# Altium PCB bigsegment.PcbDoc
Units mm, origin at the board's own origin, x right, y up, seen from the top; angles counter-clockwise.
Board outline 152.4 x 101.6 mm, 2 copper layers (Top Layer, Bottom Layer); 170 components, 143 nets, 350 pads, 0 vias.
Unrouted connection lines stored in the file: 200.
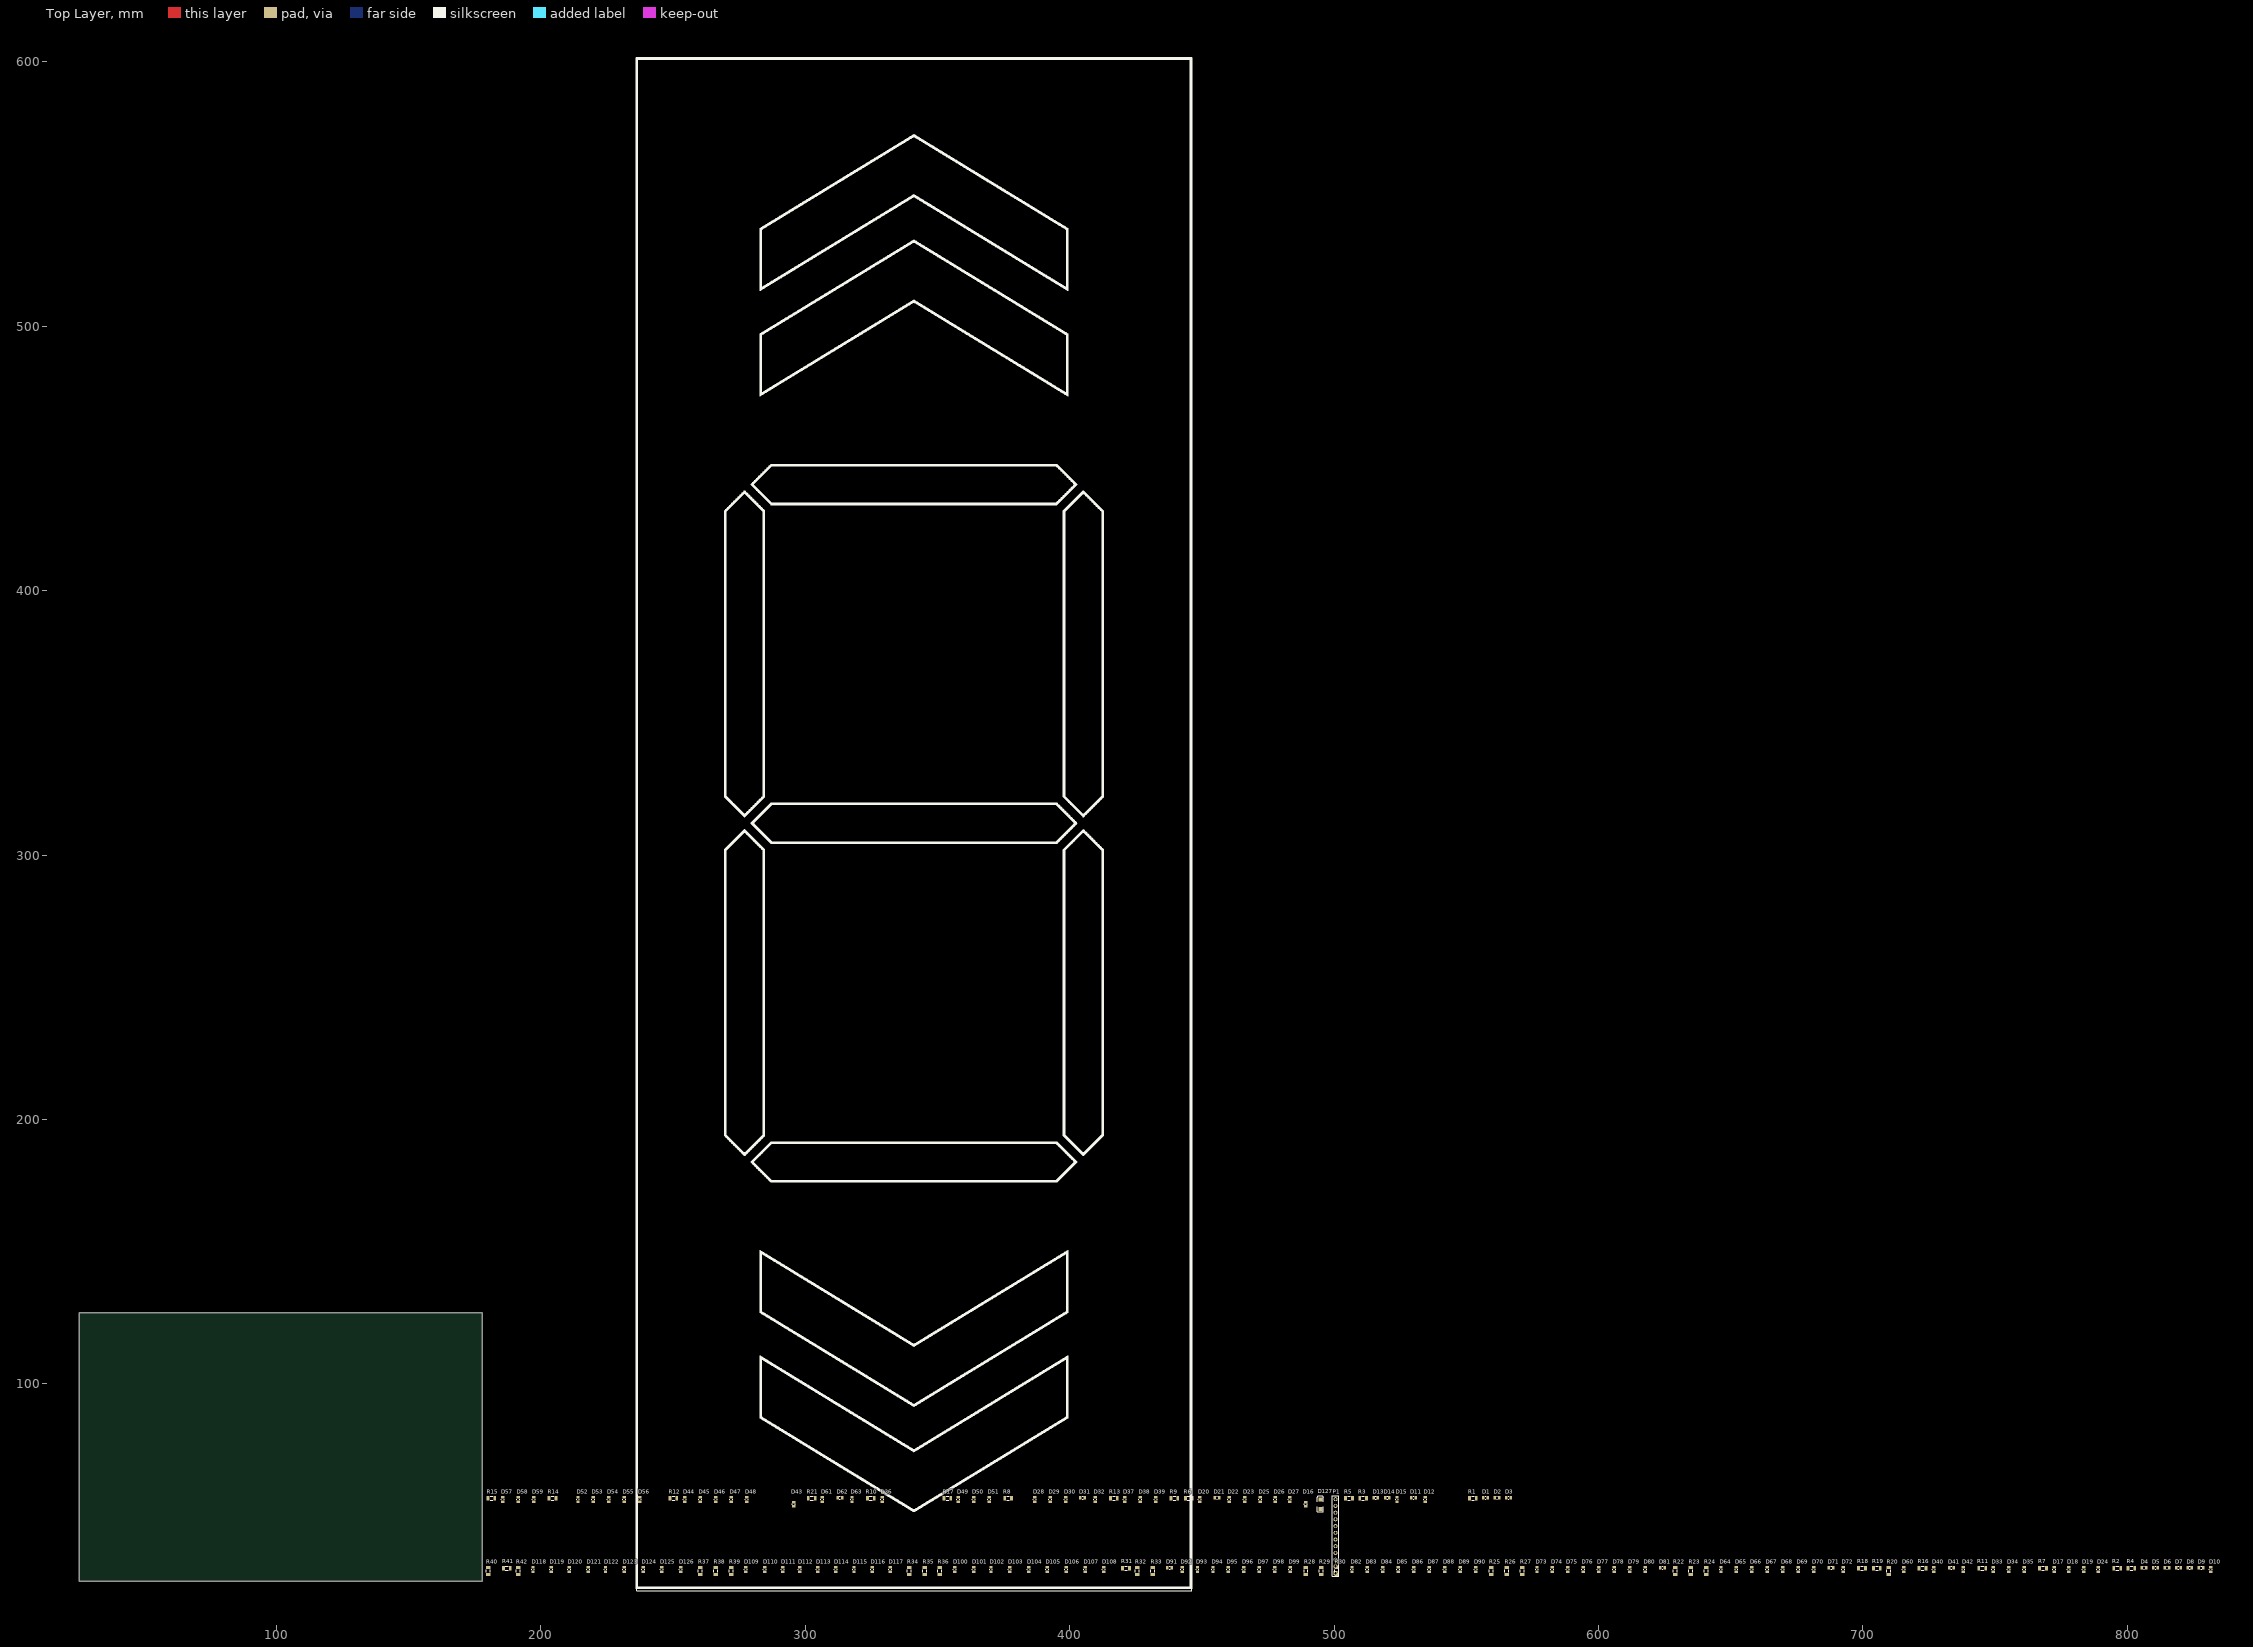
[diagram p0: Top Layer view]
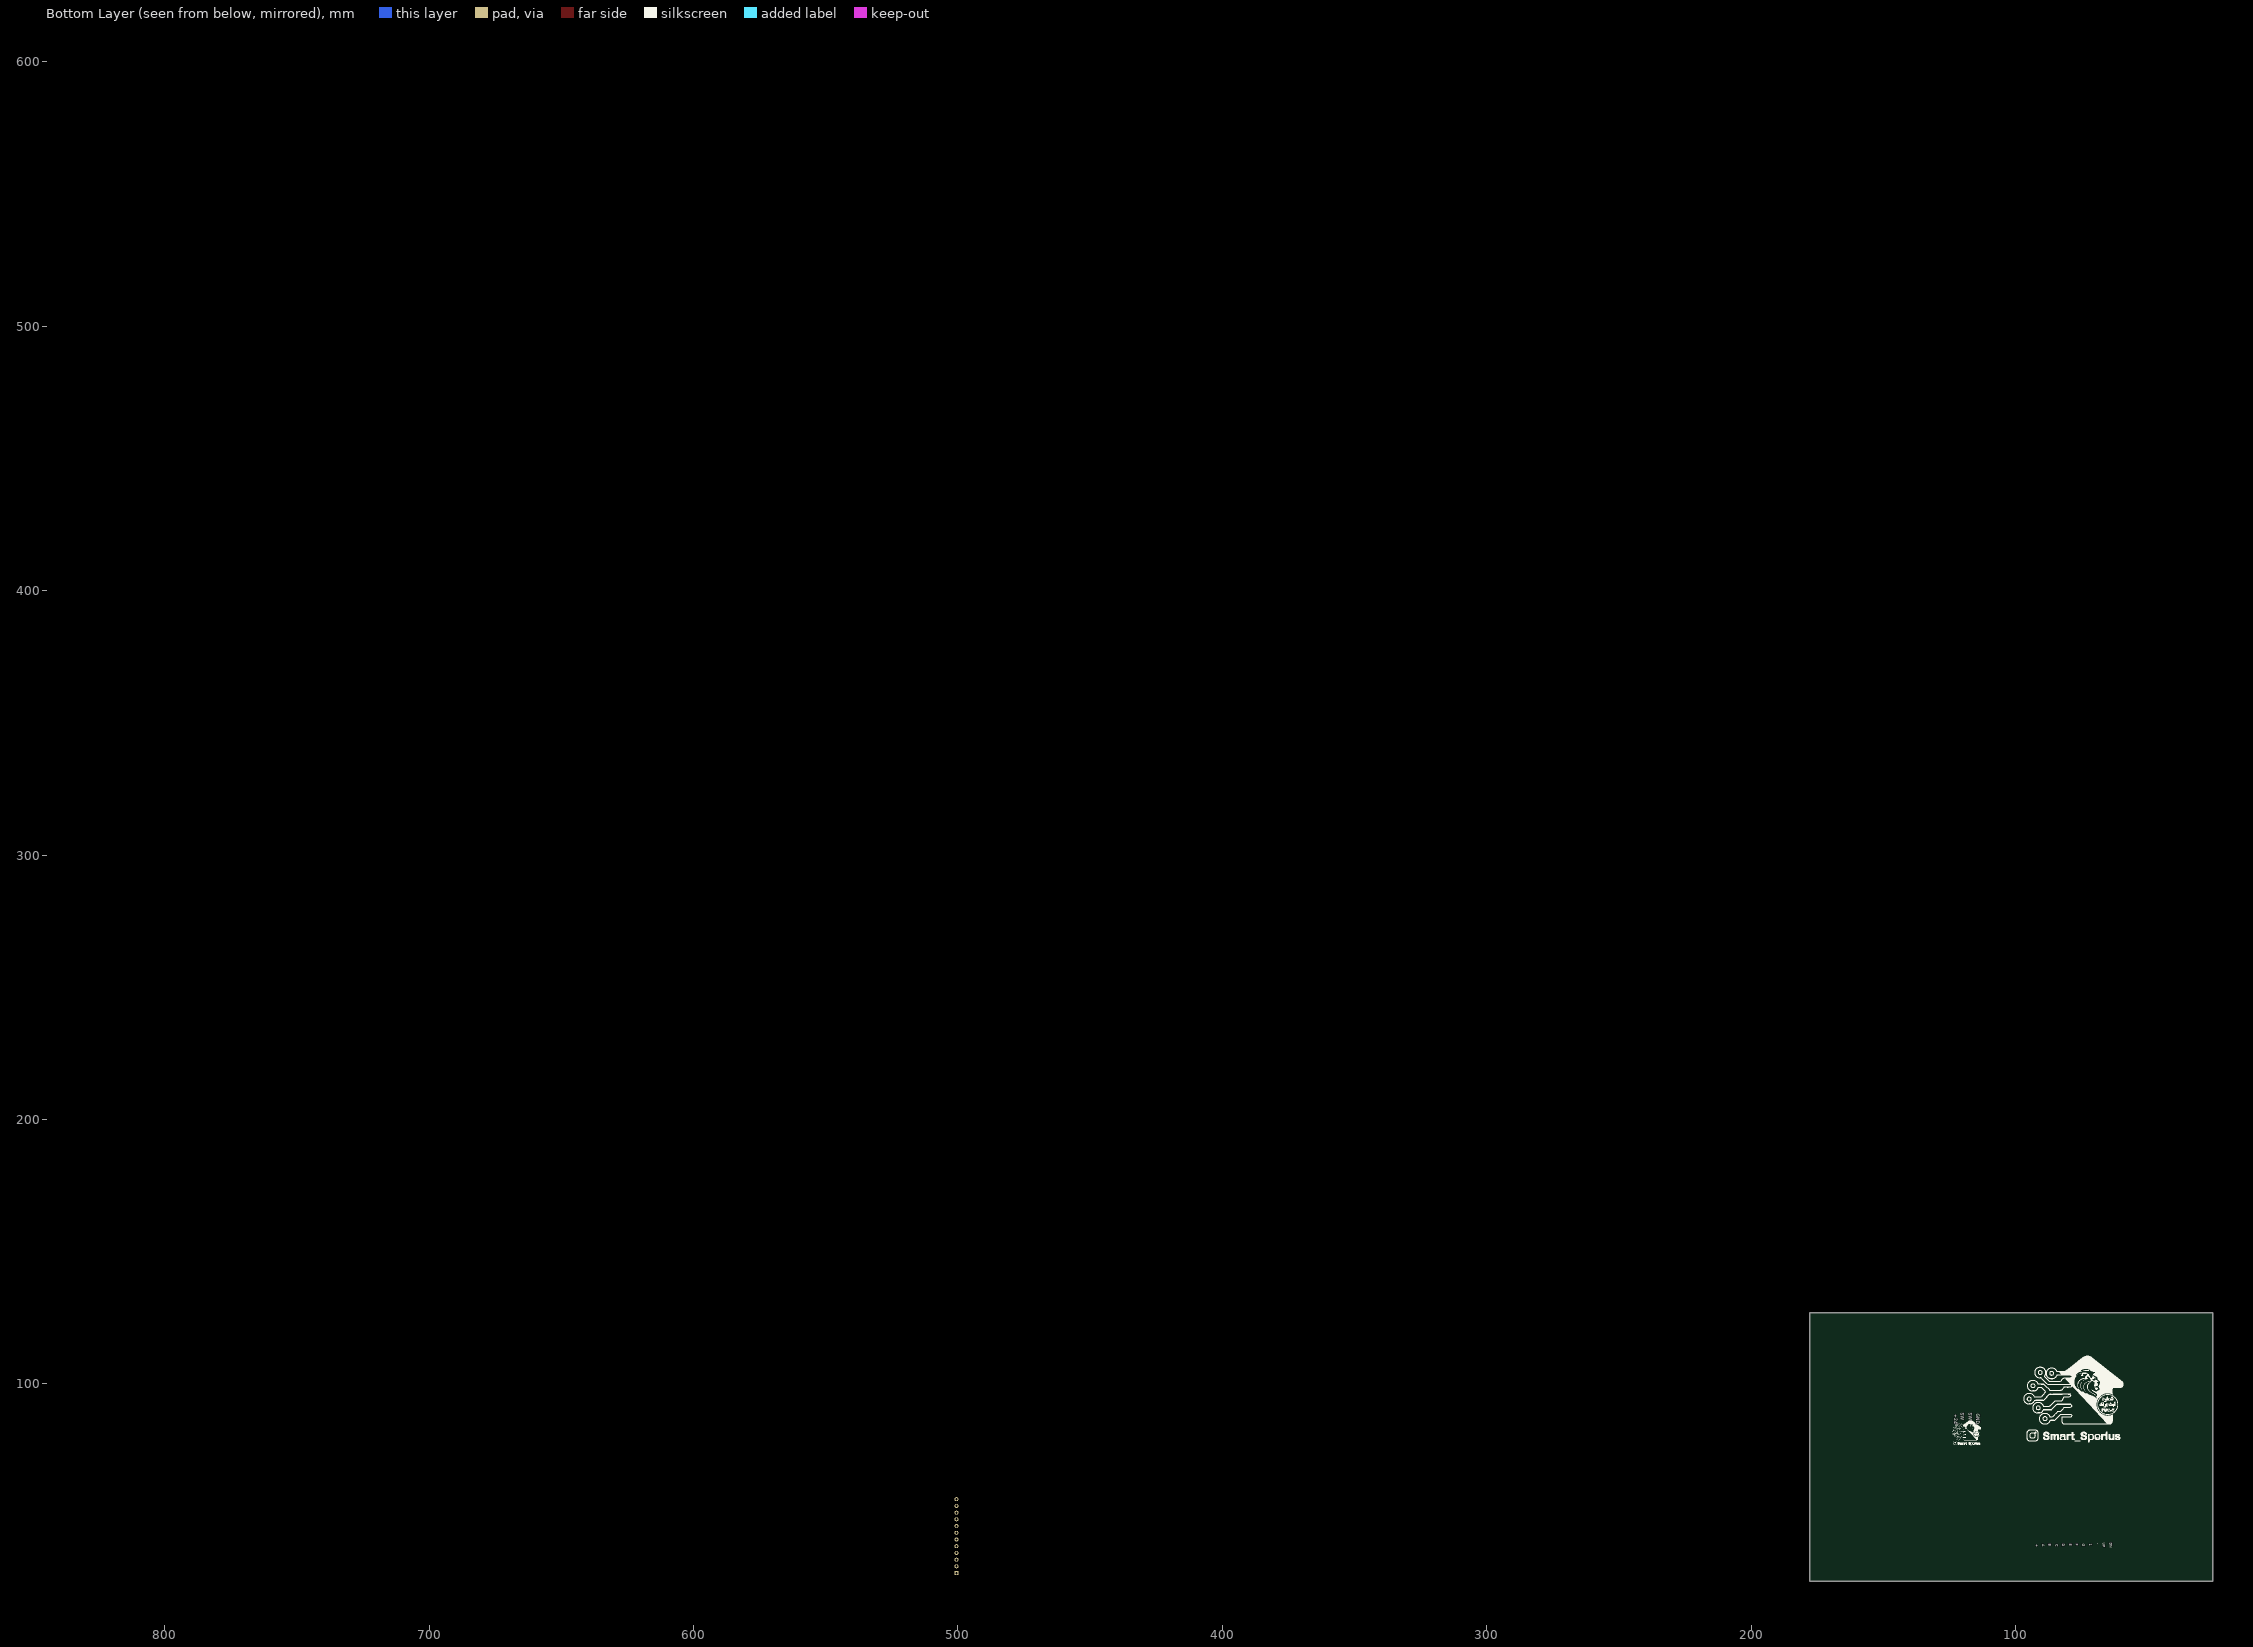
[diagram p1: Bottom Layer view, seen from below]

## Layer stack, top to bottom
Top Solder: solder mask 0.0102, Solder Resist, Dk 3.5
Top Layer: signal copper 0.0356
Dielectric 1: dielectric 0.32, FR-4, Dk 4.8
Bottom Layer: signal copper 0.0356
Bottom Solder: solder mask 0.0102, Solder Resist, Dk 3.5

## Board outline
25.4,25.4 177.8,25.4 177.8,127 25.4,127

## Design rules (kind name [scope] priority, off if disabled: settings)
Clearance Clearance_1 [All] p1: gap=0.4 ignorepadtopadclearanceinfootprint=FALSE
Clearance [All] p2: gap=0.254 ignorepadtopadclearanceinfootprint=FALSE except(0: Arc-Hole Track-Hole SMDPad-Hole THPad-Hole Via-Hole Fill-Hole Poly-Hole Region-Hole Text-Hole)
DiffPairsRouting [All] p1: maxlimit=0.8 minlimit=0.381 mostfreqgap=0.8 toplayer_minwidth=0.381 toplayer_maxwidth=0.381 toplayer_prefwidth=0.381 bottomlayer_minwidth=0.381 bottomlayer_maxwidth=0.381 bottomlayer_prefwidth=0.381 maxuncoupledlength=12.7
PolygonConnect [All] p1: connectstyle=Relief reliefconductorwidth=0.254 reliefentries=4 polygonreliefangle="90 Angle" airgapwidth=0.254
RoomDefinition bigsegment [InComponentClass('bigsegment')] p1: confinementstyle=ConfineIn formatcopy=TRUE lockcomponents=FALSE outline 178.943,26.924 211.328,26.924 211.328,32.766 178.943,32.766
RoutingVias [All] p1: holewidth=0.711 width=1.27 viastyle="Through Hole" minholewidth=0.711 minwidth=1.27 maxholewidth=0.711 maxwidth=1.27
SolderMaskExpansion [All] p1: expansion=0.102 istentingtop=FALSE
SupplyNets "Schematic Supply Nets" [InNet('VCC')] p1: voltage=0.000
Width [All] p1: maxlimit=3 minlimit=0.5 preferedwidth=1
29 further rules are at their usual default settings.

## Classes and differential pairs
component class bigsegment: D1 D2 D3 D4 D11 D12 D16 D20 D21 D22 D23 D28 D29 D30 D31 D32 D36 D43 D44 D45 D46 D47 D48 D52 D53 D54 D55 D56 D57 D58 D59 D60 D61 D62 D63 D64 D65 D66 D67 D68 D69 D70 D71 D72 D73 D74 D75 D76 D77 D78 D79 D80 D81 D82 D83 D84 D85 D86 D87 D88 D89 D90 D91 D92 D93 D94 D95 D96 D97 D98 D99 D100 D101 D102 D103 D104 D105 D106 D107 D108 D109 D110 D111 D112 D113 D114 D115 D116 D117 D118 D119 D120 D121 D122 D123 D124 D125 D126 D127 P1 R1 R3 R6 R8 R10 R12 R14 R15 R16 R17 R18 R19 R20 R21 R22 R23 R24 R25 R26 R27 R28 R29 R30 R31 R32 R33 R34 R35 R36 R37 R38 R39 R40 R41 R42

## Components (designator, comment, footprint, x,y, rotation, side; value= is the part's Value field where it differs from the comment)
D1 "MODEL" "RES 0805 (2012X06L)" 557.276,56.896 r0 top
D2 "MODEL" "RES 0805 (2012X06L)" 561.594,56.896 r0 top
D3 "MODEL" "RES 0805 (2012X06L)" 565.912,56.896 r0 top
D4 "MODEL" "RES 0805 (2012X06L)" 806.323,30.48 r0 top
D5 "MODEL" "RES 0805 (2012X06L)" 810.641,30.48 r0 top
D6 "MODEL" "RES 0805 (2012X06L)" 814.959,30.48 r0 top
D7 "MODEL" "RES 0805 (2012X06L)" 819.277,30.48 r0 top
D8 "MODEL" "RES 0805 (2012X06L)" 823.595,30.48 r0 top
D9 "MODEL" "RES 0805 (2012X06L)" 827.913,30.48 r0 top
D10 "MODEL" "RES 0805 (2012X06L)" 831.596,29.845 r90 top
D11 "MODEL" "RES 0805 (2012X06L)" 529.971,56.896 r0 top
D12 "MODEL" "RES 0805 (2012X06L)" 534.416,56.261 r90 top
D13 "MODEL" "RES 0805 (2012X06L)" 515.747,56.896 r0 top
D14 "MODEL" "RES 0805 (2012X06L)" 520.065,56.896 r0 top
D15 "MODEL" "RES 0805 (2012X06L)" 523.748,56.261 r90 top
D16 "MODEL" "RES 0805 (2012X06L)" 489.204,54.483 r90 top
D17 "MODEL" "RES 0805 (2012X06L)" 772.287,29.845 r90 top
D18 "MODEL" "RES 0805 (2012X06L)" 777.875,29.845 r90 top
D19 "MODEL" "RES 0805 (2012X06L)" 783.463,29.845 r90 top
D20 "MODEL" "RES 0805 (2012X06L)" 449.199,56.261 r90 top
D21 "MODEL" "RES 0805 (2012X06L)" 455.676,56.896 r0 top
D22 "MODEL" "RES 0805 (2012X06L)" 460.375,56.261 r90 top
D23 "MODEL" "RES 0805 (2012X06L)" 466.217,56.261 r90 top
D24 "MODEL" "RES 0805 (2012X06L)" 789.051,29.845 r90 top
D25 "MODEL" "RES 0805 (2012X06L)" 472.059,56.261 r90 top
D26 "MODEL" "RES 0805 (2012X06L)" 477.647,56.261 r90 top
D27 "MODEL" "RES 0805 (2012X06L)" 483.235,56.261 r90 top
D28 "MODEL" "RES 0805 (2012X06L)" 386.715,56.261 r90 top
D29 "MODEL" "RES 0805 (2012X06L)" 392.557,56.261 r90 top
D30 "MODEL" "RES 0805 (2012X06L)" 398.399,56.261 r90 top
D31 "MODEL" "RES 0805 (2012X06L)" 404.876,56.896 r0 top
D32 "MODEL" "RES 0805 (2012X06L)" 409.575,56.261 r90 top
D33 "MODEL" "RES 0805 (2012X06L)" 749.3,29.845 r90 top
D34 "MODEL" "RES 0805 (2012X06L)" 755.142,29.845 r90 top
D35 "MODEL" "RES 0805 (2012X06L)" 760.984,29.845 r90 top
D36 "MODEL" "RES 0805 (2012X06L)" 329.057,56.261 r90 top
D37 "MODEL" "RES 0805 (2012X06L)" 420.751,56.261 r90 top
D38 "MODEL" "RES 0805 (2012X06L)" 426.593,56.261 r90 top
D39 "MODEL" "RES 0805 (2012X06L)" 432.435,56.261 r90 top
D40 "MODEL" "RES 0805 (2012X06L)" 726.821,29.845 r90 top
D41 "MODEL" "RES 0805 (2012X06L)" 733.425,30.48 r0 top
D42 "MODEL" "RES 0805 (2012X06L)" 737.997,29.845 r90 top
D43 "MODEL" "RES 0805 (2012X06L)" 295.656,54.483 r90 top
D44 "MODEL" "RES 0805 (2012X06L)" 254.381,56.261 r90 top
D45 "MODEL" "RES 0805 (2012X06L)" 260.223,56.261 r90 top
D46 "MODEL" "RES 0805 (2012X06L)" 266.065,56.261 r90 top
D47 "MODEL" "RES 0805 (2012X06L)" 271.907,56.261 r90 top
D48 "MODEL" "RES 0805 (2012X06L)" 277.749,56.261 r90 top
D49 "MODEL" "RES 0805 (2012X06L)" 357.886,56.261 r90 top
D50 "MODEL" "RES 0805 (2012X06L)" 363.728,56.261 r90 top
D51 "MODEL" "RES 0805 (2012X06L)" 369.57,56.261 r90 top
D52 "MODEL" "RES 0805 (2012X06L)" 213.995,56.261 r90 top
D53 "MODEL" "RES 0805 (2012X06L)" 219.837,56.261 r90 top
D54 "MODEL" "RES 0805 (2012X06L)" 225.679,56.261 r90 top
D55 "MODEL" "RES 0805 (2012X06L)" 231.521,56.261 r90 top
D56 "MODEL" "RES 0805 (2012X06L)" 237.363,56.261 r90 top
D57 "MODEL" "RES 0805 (2012X06L)" 185.547,56.261 r90 top
D58 "MODEL" "RES 0805 (2012X06L)" 191.389,56.261 r90 top
D59 "MODEL" "RES 0805 (2012X06L)" 197.231,56.261 r90 top
D60 "MODEL" "RES 0805 (2012X06L)" 715.391,29.845 r90 top
D61 "MODEL" "RES 0805 (2012X06L)" 306.451,56.261 r90 top
D62 "MODEL" "RES 0805 (2012X06L)" 313.055,56.896 r0 top
D63 "MODEL" "RES 0805 (2012X06L)" 317.627,56.261 r90 top
D64 "MODEL" "RES 0805 (2012X06L)" 646.303,29.845 r90 top
D65 "MODEL" "RES 0805 (2012X06L)" 652.145,29.845 r90 top
D66 "MODEL" "RES 0805 (2012X06L)" 657.987,29.845 r90 top
D67 "MODEL" "RES 0805 (2012X06L)" 663.829,29.845 r90 top
D68 "MODEL" "RES 0805 (2012X06L)" 669.671,29.845 r90 top
D69 "MODEL" "RES 0805 (2012X06L)" 675.513,29.845 r90 top
D70 "MODEL" "RES 0805 (2012X06L)" 681.355,29.845 r90 top
D71 "MODEL" "RES 0805 (2012X06L)" 687.959,30.48 r0 top
D72 "MODEL" "RES 0805 (2012X06L)" 692.531,29.845 r90 top
D73 "MODEL" "RES 0805 (2012X06L)" 576.707,29.845 r90 top
D74 "MODEL" "RES 0805 (2012X06L)" 582.549,29.845 r90 top
D75 "MODEL" "RES 0805 (2012X06L)" 588.391,29.845 r90 top
D76 "MODEL" "RES 0805 (2012X06L)" 594.233,29.845 r90 top
D77 "MODEL" "RES 0805 (2012X06L)" 600.075,29.845 r90 top
D78 "MODEL" "RES 0805 (2012X06L)" 605.917,29.845 r90 top
D79 "MODEL" "RES 0805 (2012X06L)" 611.759,29.845 r90 top
D80 "MODEL" "RES 0805 (2012X06L)" 617.601,29.845 r90 top
D81 "MODEL" "RES 0805 (2012X06L)" 624.205,30.48 r0 top
D82 "MODEL" "RES 0805 (2012X06L)" 506.73,29.845 r90 top
D83 "MODEL" "RES 0805 (2012X06L)" 512.572,29.845 r90 top
D84 "MODEL" "RES 0805 (2012X06L)" 518.414,29.845 r90 top
D85 "MODEL" "RES 0805 (2012X06L)" 524.256,29.845 r90 top
D86 "MODEL" "RES 0805 (2012X06L)" 530.098,29.845 r90 top
D87 "MODEL" "RES 0805 (2012X06L)" 535.94,29.845 r90 top
D88 "MODEL" "RES 0805 (2012X06L)" 541.782,29.845 r90 top
D89 "MODEL" "RES 0805 (2012X06L)" 547.624,29.845 r90 top
D90 "MODEL" "RES 0805 (2012X06L)" 553.466,29.845 r90 top
D91 "MODEL" "RES 0805 (2012X06L)" 437.769,30.48 r0 top
D92 "MODEL" "RES 0805 (2012X06L)" 442.468,29.845 r90 top
D93 "MODEL" "RES 0805 (2012X06L)" 448.31,29.845 r90 top
D94 "MODEL" "RES 0805 (2012X06L)" 454.152,29.845 r90 top
D95 "MODEL" "RES 0805 (2012X06L)" 459.994,29.845 r90 top
D96 "MODEL" "RES 0805 (2012X06L)" 465.836,29.845 r90 top
D97 "MODEL" "RES 0805 (2012X06L)" 471.678,29.845 r90 top
D98 "MODEL" "RES 0805 (2012X06L)" 477.52,29.845 r90 top
D99 "MODEL" "RES 0805 (2012X06L)" 483.362,29.845 r90 top
D100 "MODEL" "RES 0805 (2012X06L)" 356.489,29.845 r90 top
D101 "MODEL" "RES 0805 (2012X06L)" 363.601,29.845 r90 top
D102 "MODEL" "RES 0805 (2012X06L)" 370.205,29.845 r90 top
D103 "MODEL" "RES 0805 (2012X06L)" 377.317,29.845 r90 top
D104 "MODEL" "RES 0805 (2012X06L)" 384.429,29.845 r90 top
D105 "MODEL" "RES 0805 (2012X06L)" 391.541,29.845 r90 top
D106 "MODEL" "RES 0805 (2012X06L)" 398.653,29.845 r90 top
D107 "MODEL" "RES 0805 (2012X06L)" 405.765,29.845 r90 top
D108 "MODEL" "RES 0805 (2012X06L)" 412.877,29.845 r90 top
D109 "MODEL" "RES 0805 (2012X06L)" 277.495,29.845 r90 top
D110 "MODEL" "RES 0805 (2012X06L)" 284.607,29.845 r90 top
D111 "MODEL" "RES 0805 (2012X06L)" 291.465,29.845 r90 top
D112 "MODEL" "RES 0805 (2012X06L)" 297.815,29.845 r90 top
D113 "MODEL" "RES 0805 (2012X06L)" 304.673,29.845 r90 top
D114 "MODEL" "RES 0805 (2012X06L)" 311.531,29.845 r90 top
D115 "MODEL" "RES 0805 (2012X06L)" 318.389,29.845 r90 top
D116 "MODEL" "RES 0805 (2012X06L)" 325.247,29.845 r90 top
D117 "MODEL" "RES 0805 (2012X06L)" 332.105,29.845 r90 top
D118 "MODEL" "RES 0805 (2012X06L)" 196.977,29.845 r90 top
D119 "MODEL" "RES 0805 (2012X06L)" 203.835,29.845 r90 top
D120 "MODEL" "RES 0805 (2012X06L)" 210.693,29.845 r90 top
D121 "MODEL" "RES 0805 (2012X06L)" 217.805,29.845 r90 top
D122 "MODEL" "RES 0805 (2012X06L)" 224.409,29.845 r90 top
D123 "MODEL" "RES 0805 (2012X06L)" 231.521,29.845 r90 top
D124 "MODEL" "RES 0805 (2012X06L)" 238.633,29.845 r90 top
D125 "MODEL" "RES 0805 (2012X06L)" 245.745,29.845 r90 top
D126 "MODEL" "RES 0805 (2012X06L)" 252.857,29.845 r90 top
D127 "D Tunnel1" 3.2X1.6X1.1 494.792,54.483 r90 top
P1 "Header 12" HDR1X12 500.507,28.448 r90 top
R1 "10K" "RES 1206 (3216X08L)" 552.45,56.769 r0 top
R2 "10K" "RES 1206 (3216X08L)" 796.163,30.353 r0 top
R3 "10K" "RES 1206 (3216X08L)" 510.921,56.769 r0 top
R4 "10K" "RES 1206 (3216X08L)" 801.497,30.353 r0 top
R5 "10K" "RES 1206 (3216X08L)" 505.587,56.769 r0 top
R6 "10K" "RES 1206 (3216X08L)" 445.008,56.769 r0 top
R7 "10K" "RES 1206 (3216X08L)" 768.096,30.353 r0 top
R8 "10K" "RES 1206 (3216X08L)" 376.682,56.769 r0 top
R9 "10K" "RES 1206 (3216X08L)" 439.547,56.769 r0 top
R10 "10K" "RES 1206 (3216X08L)" 324.739,56.769 r0 top
R11 "10K" "RES 1206 (3216X08L)" 745.109,30.353 r0 top
R12 "10K" "RES 1206 (3216X08L)" 250.063,56.769 r0 top
R13 "10K" "RES 1206 (3216X08L)" 416.687,56.769 r0 top
R14 "10K" "RES 1206 (3216X08L)" 204.343,56.769 r0 top
R15 "10K" "RES 1206 (3216X08L)" 181.229,56.769 r0 top
R16 "10K" "RES 1206 (3216X08L)" 722.503,30.353 r0 top
R17 "10K" "RES 1206 (3216X08L)" 353.695,56.769 r0 top
R18 "10K" "RES 1206 (3216X08L)" 699.643,30.353 r0 top
R19 "10K" "RES 1206 (3216X08L)" 705.231,30.353 r0 top
R20 "10K" "RES 1206 (3216X08L)" 709.803,29.21 r90 top
R21 "10K" "RES 1206 (3216X08L)" 302.387,56.769 r0 top
R22 "10K" "RES 1206 (3216X08L)" 629.031,29.21 r90 top
R23 "10K" "RES 1206 (3216X08L)" 634.873,29.21 r90 top
R24 "10K" "RES 1206 (3216X08L)" 640.715,29.21 r90 top
R25 "10K" "RES 1206 (3216X08L)" 559.435,29.21 r90 top
R26 "10K" "RES 1206 (3216X08L)" 565.277,29.21 r90 top
R27 "10K" "RES 1206 (3216X08L)" 571.119,29.21 r90 top
R28 "10K" "RES 1206 (3216X08L)" 489.331,29.21 r90 top
R29 "10K" "RES 1206 (3216X08L)" 495.173,29.21 r90 top
R30 "10K" "RES 1206 (3216X08L)" 501.015,29.21 r90 top
R31 "10K" "RES 1206 (3216X08L)" 421.259,30.353 r0 top
R32 "10K" "RES 1206 (3216X08L)" 425.577,29.21 r90 top
R33 "10K" "RES 1206 (3216X08L)" 431.419,29.21 r90 top
R34 "10K" "RES 1206 (3216X08L)" 339.217,29.21 r90 top
R35 "10K" "RES 1206 (3216X08L)" 345.059,29.21 r90 top
R36 "10K" "RES 1206 (3216X08L)" 350.901,29.21 r90 top
R37 "10K" "RES 1206 (3216X08L)" 260.223,29.21 r90 top
R38 "10K" "RES 1206 (3216X08L)" 266.065,29.21 r90 top
R39 "10K" "RES 1206 (3216X08L)" 271.907,29.21 r90 top
R40 "10K" "RES 1206 (3216X08L)" 180.086,29.21 r90 top
R41 "10K" "RES 1206 (3216X08L)" 187.071,30.353 r0 top
R42 "10K" "RES 1206 (3216X08L)" 191.389,29.21 r90 top

## Footprints (in the part's own frame and the unit in brackets; to place one, negate y for a bottom-side part, rotate by r counter-clockwise, add the part's x,y. Pads: shape width x height; smd on the part's side, far side on the other; paste and mask are expansions set on the pad)
3.2X1.6X1.1 [mm] "SMT LED; 2 Flat Leads"
  rect 1.5x1.5 smd: 1(-1.75,0) 2(1.75,0)
  silkscreen extent -2.9,-1.15 3.2,1.15
HDR1X12 [mm] "Connector; Header; 12 Position"
  rect 1.5x1.5 hole 0.9: 1(0,0)
  round 1.5 hole 0.9: 2(2.54,0) 3(5.08,0) 4(7.62,0) 5(10.16,0) 6(12.7,0) 7(15.24,0) 8(17.78,0) 9(20.32,0) 10(22.86,0) 11(25.4,0) 12(27.94,0)
  silkscreen extent -1.27,-1.27 29.21,1.27
"RES 0805 (2012X06L)" [mm] "Chip Resistor, 2-Leads, Body 2.0x1.3mm, IPC High Density _ (0.100 W)"
  rect 0.95x1.3 smd: 1(-0.838,0) 2(0.812,0)
  silkscreen extent -0.16,-0.55 0.14,0.55, body extent -1.03,-0.63 1,0.64, height 0.6
"RES 1206 (3216X08L)" [mm] "Chip Resistor, 2-Leads, Body 3.2x1.6mm, IPC High Density _ (0.125 W)"
  rect 1.05x1.7 smd: 1(-1.295,0) 2(1.301,0)
  silkscreen extent -0.5,-0.75 0.5,0.75, body extent -1.52,-0.76 1.53,0.76, height 0.6

## Part data
D1 D2 D3 D4 D5 D6 D7 D8 D9 D10 D11 D12 D13 D14 D15 D16 D17 D18 D19 D20 D21 D22 D23 D24 D25 D26 D27 D28 D29 D30 D31 D32 D33 D34 D35 D36 D37 D38 D39 D40 D41 D42 D43 D44 D45 D46 D47 D48 D49 D50 D51 D52 D53 D54 D55 D56 D57 D58 D59 D60 D61 D62 D63 D64 D65 D66 D67 D68 D69 D70 D71 D72 D73 D74 D75 D76 D77 D78 D79 D80 D81 D82 D83 D84 D85 D86 D87 D88 D89 D90 D91 D92 D93 D94 D95 D96 D97 D98 D99 D100 D101 D102 D103 D104 D105 D106 D107 D108 D109 D110 D111 D112 D113 D114 D115 D116 D117 D118 D119 D120 D121 D122 D123 D124 D125 D126: library part "LED 5mm", "Typical LED", COLOR=RED
D127: "Tunnel Diode - RLC Model", LatestRevisionDate=17-Jul-2002, LatestRevisionNote="Re-released for DXP Platform.", PackageDescription="SM LED; 2 Flat Leads", PackageReference=3.2X1.6X1.1, PackageVersion=Feb-2002, Published=8-Jun-2000, Publisher="Altium Limited", Simulation ModelName=DTUNNEL1, Simulation PortMap=(1:1),(2:2)
P1: "Header, 12-Pin", LatestRevisionDate=17-Jul-2002, LatestRevisionNote="Re-released for DXP Platform.", Publisher="Altium Limited"
R1 R2 R3 R4 R5 R6 R7 R8 R9 R10 R11 R12 R13 R14 R15 R16 R17 R18 R19 R20 R21 R22 R23 R24 R25 R26 R27 R28 R29 R30 R31 R32 R33 R34 R35 R36 R37 R38 R39 R40 R41 R42: library part Resistor, "Resistor", Power="1/4 W", Tolerance=5%, Simulation ModelName="Model Name", Simulation PortMap=(1:1),(2:2)

## Nets (pads, with @x,y where several pads share a name; then routed paths per layer and width w, separated by ;. In a path a pad name is that pad's centre, name@x,y a point inside that pad or via, vN(x,y) a via of type N, cw(c..) or ccw(c..) an arc to the next point about the centre after c; other vN are vias at no path point)
1: P1.9
+: D127.1 P1.1
-: P1.10
A: P1.2 R1.1 R5.1 R9.1 R13.1 R17.1 R21.1
B: P1.3
C: P1.4 R3.1 R7.1 R11.1 R15.1 R19.1 R23.1
D: P1.5
DN: P1.12
E: P1.6
F: P1.7 R26.1 R29.1 R32.1 R35.1 R38.1 R41.1
G: P1.8
NetD1_2: D1.2 D2.1
NetD2_2: D2.2 D3.1
NetD3_2: D3.2 R1.2
NetD4_2: D4.2 D5.1
NetD5_2: D5.2 D6.1
NetD6_2: D6.2 R2.2
NetD7_2: D7.2 D8.1
NetD8_2: D8.2 D9.1
NetD9_2: D9.2 R3.2
NetD10_2: D10.2 D11.1
NetD11_2: D11.2 D12.1
NetD12_2: D12.2 R4.2
NetD13_2: D13.2 D14.1
NetD14_2: D14.2 D15.1
NetD15_2: D15.2 R5.2
NetD16_2: D16.2 D17.1
NetD17_2: D17.2 D18.1
NetD18_2: D18.2 R6.2
NetD19_2: D19.2 D20.1
NetD20_2: D20.2 D21.1
NetD21_2: D21.2 R7.2
NetD22_2: D22.2 D23.1
NetD23_2: D23.2 D24.1
NetD24_2: D24.2 R8.2
NetD25_2: D25.2 D26.1
NetD26_2: D26.2 D27.1
NetD27_2: D27.2 R9.2
NetD28_2: D28.2 D29.1
NetD29_2: D29.2 D30.1
NetD30_2: D30.2 R10.2
NetD31_2: D31.2 D32.1
NetD32_2: D32.2 D33.1
NetD33_2: D33.2 R11.2
NetD34_2: D34.2 D35.1
NetD35_2: D35.2 D36.1
NetD36_2: D36.2 R12.2
NetD37_2: D37.2 D38.1
NetD38_2: D38.2 D39.1
NetD39_2: D39.2 R13.2
NetD40_2: D40.2 D41.1
NetD41_2: D41.2 D42.1
NetD42_2: D42.2 R14.2
NetD43_2: D43.2 D44.1
NetD44_2: D44.2 D45.1
NetD45_2: D45.2 R15.2
NetD46_2: D46.2 D47.1
NetD47_2: D47.2 D48.1
NetD48_2: D48.2 R16.2
NetD49_2: D49.2 D50.1
NetD50_2: D50.2 D51.1
NetD51_2: D51.2 R17.2
NetD52_2: D52.2 D53.1
NetD53_2: D53.2 D54.1
NetD54_2: D54.2 R18.2
NetD55_2: D55.2 D56.1
NetD56_2: D56.2 D57.1
NetD57_2: D57.2 R19.2
NetD58_2: D58.2 D59.1
NetD59_2: D59.2 D60.1
NetD60_2: D60.2 R20.2
NetD61_2: D61.2 D62.1
NetD62_2: D62.2 D63.1
NetD63_2: D63.2 R21.2
NetD64_2: D64.2 D65.1
NetD65_2: D65.2 D66.1
NetD66_2: D66.2 R22.2
NetD67_2: D67.2 D68.1
NetD68_2: D68.2 D69.1
NetD69_2: D69.2 R23.2
NetD70_2: D70.2 D71.1
NetD71_2: D71.2 D72.1
NetD72_2: D72.2 R24.2
NetD73_2: D73.2 D74.1
NetD74_2: D74.2 D75.1
NetD75_2: D75.2 R25.2
NetD76_2: D76.2 D77.1
NetD77_2: D77.2 D78.1
NetD78_2: D78.2 R26.2
NetD79_2: D79.2 D80.1
NetD80_2: D80.2 D81.1
NetD81_2: D81.2 R27.2
NetD82_2: D82.2 D83.1
NetD83_2: D83.2 D84.1
NetD84_2: D84.2 R28.2
NetD85_2: D85.2 D86.1
NetD86_2: D86.2 D87.1
NetD87_2: D87.2 R29.2
NetD88_2: D88.2 D89.1
NetD89_2: D89.2 D90.1
NetD90_2: D90.2 R30.2
NetD91_2: D91.2 D92.1
NetD92_2: D92.2 D93.1
NetD93_2: D93.2 R31.2
NetD94_2: D94.2 D95.1
NetD95_2: D95.2 D96.1
NetD96_2: D96.2 R32.2
NetD97_2: D97.2 D98.1
NetD98_2: D98.2 D99.1
NetD99_2: D99.2 R33.2
NetD100_2: D100.2 D101.1
NetD101_2: D101.2 D102.1
NetD102_2: D102.2 R34.2
NetD103_2: D103.2 D104.1
NetD104_2: D104.2 D105.1
NetD105_2: D105.2 R35.2
NetD106_2: D106.2 D107.1
NetD107_2: D107.2 D108.1
NetD108_2: D108.2 R36.2
NetD109_2: D109.2 D110.1
NetD110_2: D110.2 D111.1
NetD111_2: D111.2 R37.2
NetD112_2: D112.2 D113.1
NetD113_2: D113.2 D114.1
NetD114_2: D114.2 R38.2
NetD115_2: D115.2 D116.1
NetD116_2: D116.2 D117.1
NetD117_2: D117.2 R39.2
NetD118_2: D118.2 D119.1
NetD119_2: D119.2 D120.1
NetD120_2: D120.2 R40.2
NetD121_2: D121.2 D122.1
NetD122_2: D122.2 D123.1
NetD123_2: D123.2 R41.2
NetD124_2: D124.2 D125.1
NetD125_2: D125.2 D126.1
NetD126_2: D126.2 R42.2
NetR2_1: R2.1 R6.1 R10.1 R14.1 R18.1 R22.1
NetR4_1: R4.1 R8.1 R12.1 R16.1 R20.1 R24.1
NetR25_1: R25.1 R28.1 R31.1 R34.1 R37.1 R40.1
NetR27_1: R27.1 R30.1 R33.1 R36.1 R39.1 R42.1
UP: P1.11
VCC: D1.1 D4.1 D7.1 D10.1 D13.1 D16.1 D19.1 D22.1 D25.1 D28.1 D31.1 D34.1 D49.1 D52.1 D55.1 D58.1 D61.1 D64.1 D67.1 D70.1 D73.1 D76.1 D79.1 D82.1 D85.1 D88.1 D91.1 D94.1 D97.1 D109.1 D112.1 D115.1 D118.1 D121.1 D124.1 D127.2
pads on no net: D37.1 D40.1 D43.1 D46.1 D100.1 D103.1 D106.1

## Silkscreen, mask and mechanical layers (free items; w line width, h text height)
Top Overlay:
  drawing of 16 lines, arcs and shapes, not listed
Bottom Overlay:
  drawing of 89 lines, arcs and shapes, not listed
  text "SW" at 117.729,89.027 h1.2 r90
  text "SW" at 120.65,89.027 h1.2 r90
  text "GND" at 114.808,88.646 h1.2 r90
  text "+24" at 123.19,88.519 h1.2 r90
  text "DN" at 64.379,39.866 h1 r90
  text "UP" at 67.029,39.866 h1 r90
  text "-" at 69.443,39.805 h1 r90
  text "1" at 72.079,39.602 h1 r90
  text "F" at 77.154,39.527 h1 r90
  text "D" at 82.304,39.527 h1 r90
  text "G" at 74.629,39.502 h1 r90
  text "E" at 79.729,39.502 h1 r90
  text "B" at 87.304,39.502 h1 r90
  text "C" at 84.804,39.427 h1 r90
  text "A" at 89.854,39.427 h1 r90
  text "+" at 92.329,39.427 h1 r90